# Altium PCB lab7.PcbDoc
Units mil, origin at the board's own origin, x right, y up, seen from the top; angles counter-clockwise.
Board outline 5551.18 x 3661.42 mil, 2 copper layers (Top Layer, Top, Bottom Layer, Bottom); 13 components, 0 nets, 40 pads, 0 vias.
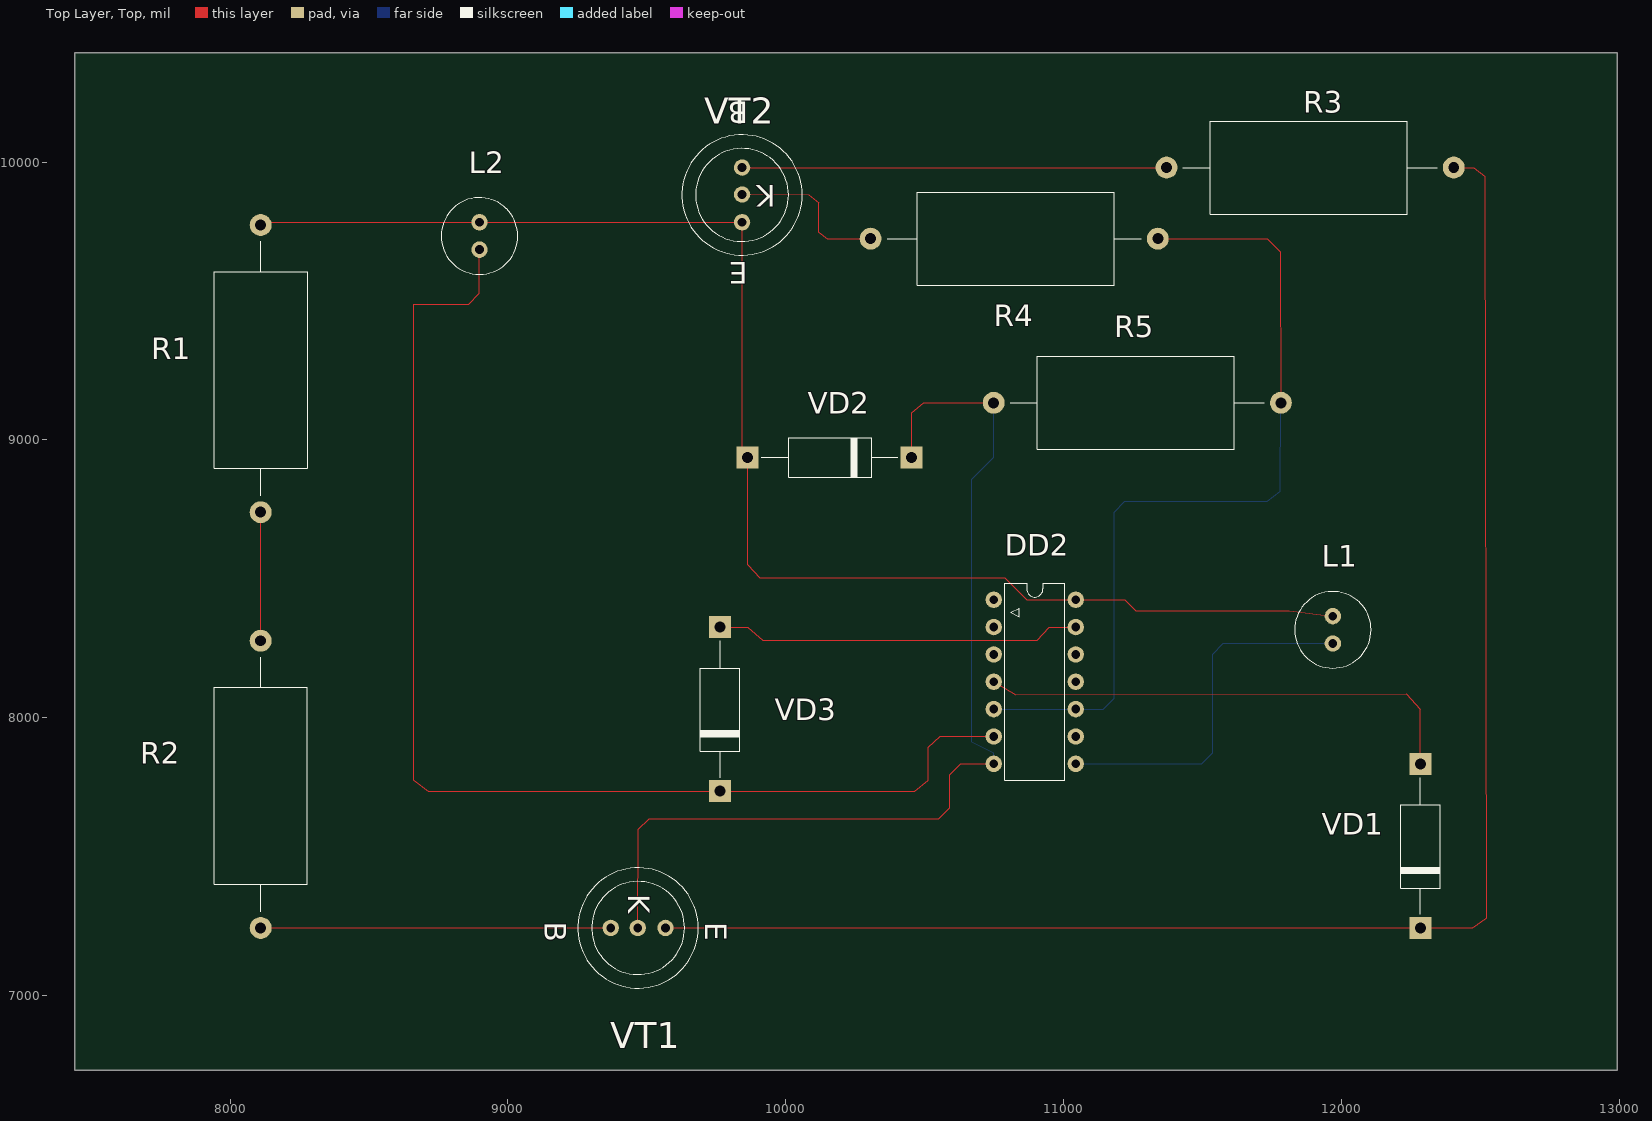
[diagram p0: Top Layer, Top view]
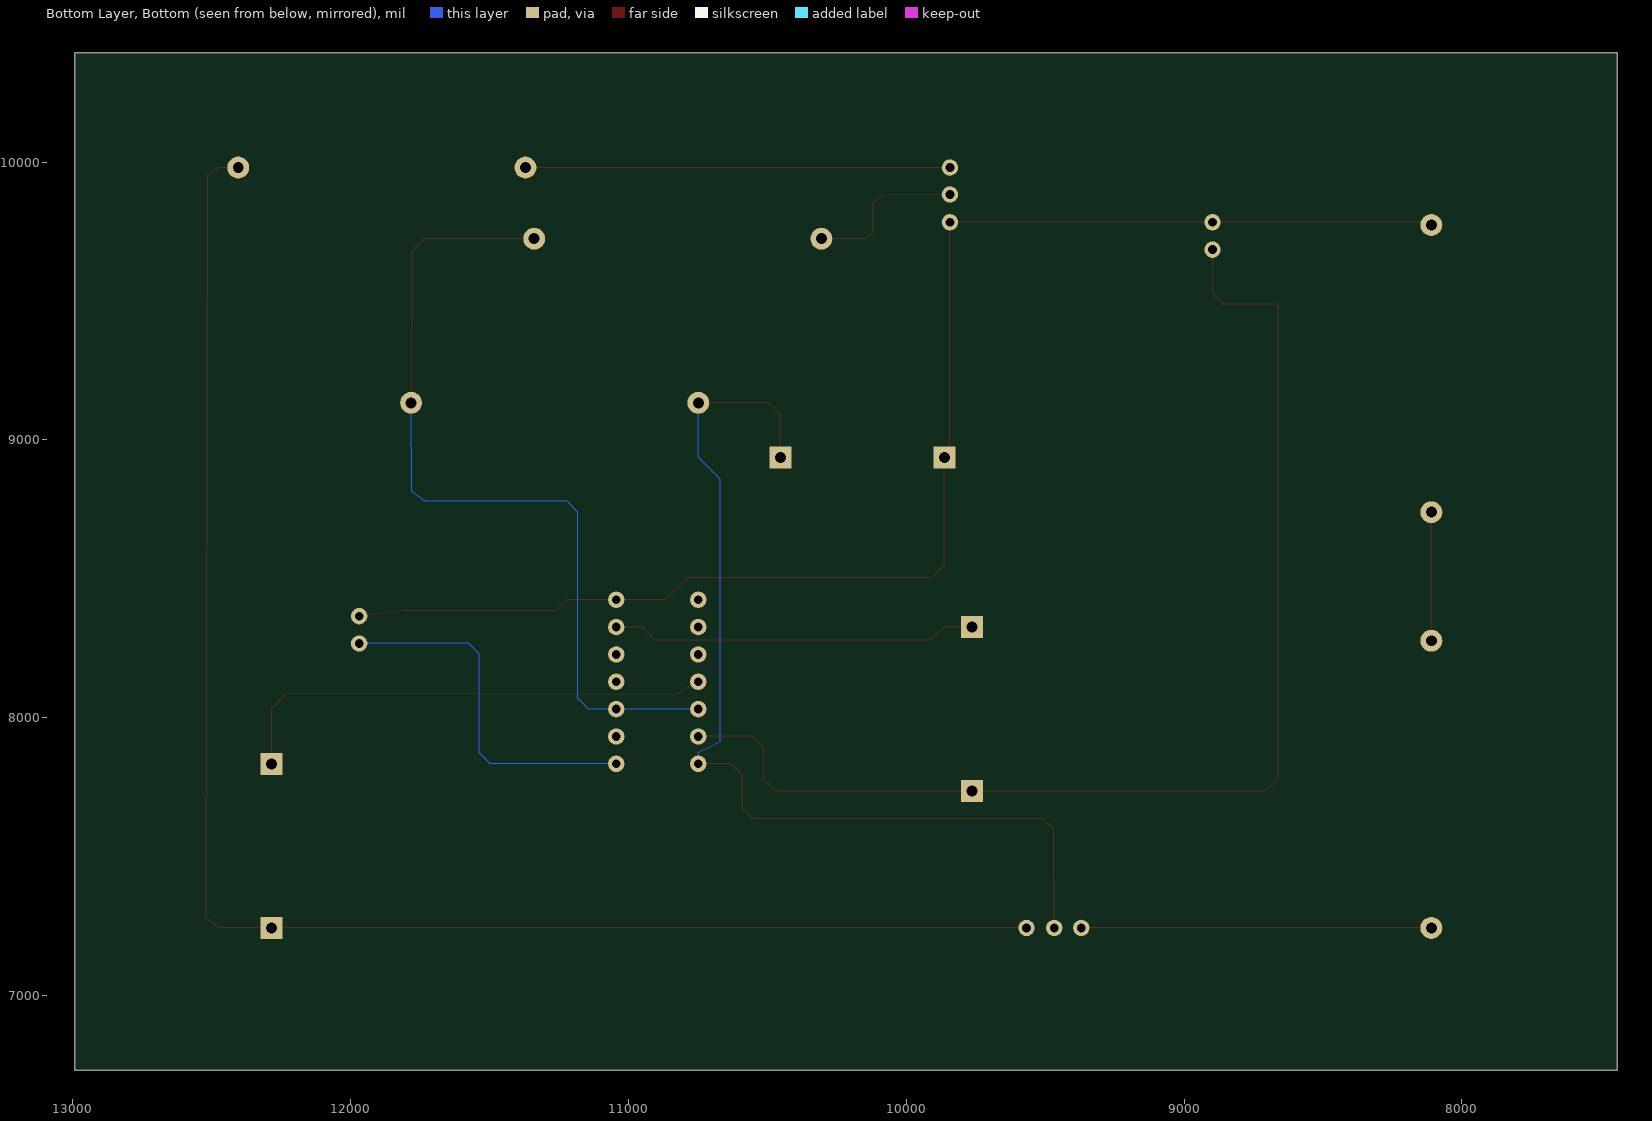
[diagram p1: Bottom Layer, Bottom view, seen from below]

## Layer stack, top to bottom
Top Solder, Top Mask: solder mask 0.4, Solder Resist, Dk 3.5
Top Layer, Top: signal copper 1.4
Dielectric 1: dielectric 12.6, FR-4, Dk 4.8
Bottom Layer, Bottom: signal copper 1.4
Bottom Solder, Bot Mask: solder mask 0.4, Solder Resist, Dk 3.5

## Board outline
7440.94,6732.28 12992.13,6732.28 12992.13,10393.7 7440.94,10393.7

## Design rules (kind name [scope] priority, off if disabled: settings)
Clearance [All] p1: gap=10 ignorepadtopadclearanceinfootprint=FALSE except(0: Arc-Hole Track-Hole SMDPad-Hole THPad-Hole Via-Hole Fill-Hole Poly-Hole Region-Hole Text-Hole; 12: Arc-Arc Arc-Track Arc-THPad Arc-Via Track-Track Track-THPad Track-Via THPad-THPad THPad-Via Via-Via)
PlaneClearance [All] p1: clearance=10
PolygonConnect [All] p1: connectstyle=Relief reliefconductorwidth=10 reliefentries=4 polygonreliefangle="90 Angle" airgapwidth=10
RoutingVias [All] p1: holewidth=28 width=50 viastyle="Through Hole" minholewidth=28 minwidth=50 maxholewidth=28 maxwidth=50
SolderMaskExpansion [All] p1: expansion=4 istentingtop=FALSE
Width [All] p1: maxlimit=10 minlimit=10 preferedwidth=10
29 further rules are at their usual default settings.

## Components (designator, comment, footprint, x,y, rotation, side; value= is the part's Value field where it differs from the comment)
DD2 "" 201.14-1 10748.03,8425.2 r0 top
L1 "{Value}" HL_MINI 11968.5,8267.72 r0 top
L2 "{Value}" HL_MINI 8897.64,9685.04 r0 top
R1 "51K" C2-33H-2W 8110.24,8740.16 r90 top
R2 "1K" C2-33H-2W 8110.24,7244.09 r90 top
R3 "3K" C2-33H-2W 11370.08,9980.32 r0 top
R4 "200" C2-33H-2W 11338.58,9724.41 r180 top
R5 "200" C2-33H-2W 10748.03,9133.86 r0 top
VD1 "" DO-7_1N34(Primary) 12283.46,7539.37 r90 top
VD2 "" DO-7_1N34(Primary) 10157.48,8937.01 r180 top
VD3 "" DO-7_1N34(Primary) 9763.78,8031.5 r90 top
VT1 "" ÃÒ320Á 9566.93,7244.09 r270 top
VT2 "" ÃÒ320Á 9842.52,9783.46 r180 top

## Footprints (in the part's own frame and the unit in brackets; to place one, negate y for a bottom-side part, rotate by r counter-clockwise, add the part's x,y. Pads: shape width x height; smd on the part's side, far side on the other; paste and mask are expansions set on the pad)
201.14-1 [mm]
  round 1.5 hole 0.8: 1(0,0) 2(0,-2.5) 3(0,-5) 4(0,-7.5) 5(0,-10) 6(0,-12.5) 7(0,-15) 8(7.5,-15) 9(7.5,-12.5) 10(7.5,-10) 11(7.5,-7.5) 12(7.5,-5) 13(7.5,-2.5) 14(7.5,0)
  silkscreen extent 1,-16.52 6.5,1.5
C2-33H-2W [mm]
  round 2 hole 1: 1(0,0) 2(26.25,0)
  silkscreen extent 1.5,-4.25 24.75,4.25
DO-7_1N34(Primary) [mm]
  rect 2x2 hole 1: A(7.5,0) K(-7.5,0)
  silkscreen extent -6.25,-1.8 6.25,1.8
HL_MINI [mm]
  round 1.5 hole 0.8: 1(0,0) 2(0,2.5)
  silkscreen extent -3.5,-2.25 3.5,4.75
ÃÒ320Á [mm]
  round 1.5 hole 0.8: 1(0,0) 2(0,-2.54) 3(0,-5)
  silkscreen extent -5.5,-8 5.5,3

## Nets (pads, with @x,y where several pads share a name; then routed paths per layer and width w, separated by ;. In a path a pad name is that pad's centre, name@x,y a point inside that pad or via, vN(x,y) a via of type N, cw(c..) or ccw(c..) an arc to the next point about the centre after c; other vN are vias at no path point)
pads on no net: DD2.1 DD2.2 DD2.3 DD2.4 DD2.5 DD2.6 DD2.7 DD2.8 DD2.9 DD2.10 DD2.11 DD2.12 DD2.13 DD2.14 L1.1 L1.2 L2.1 L2.2 R1.1 R1.2 R2.1 R2.2 R3.1 R3.2 R4.1 R4.2 R5.1 R5.2 VD1.A VD1.K VD2.A VD2.K VD3.A VD3.K VT1.1 VT1.2 VT1.3 VT2.1 VT2.2 VT2.3
copper on no net: | length 30245.9
  Top Layer, Top w3.94: 8110.24,7244.09 9370.08,7244.09 ; 8110.24,8277.56 8110.24,8740.16 ; 8110.24,9773.62 8125.98,9783.46 8897.64,9783.46 9842.52,9783.46 9842.52,8937.01 9862.2,8937.01 9862.2,8551.18 9905.51,8503.94 10787.4,8503.94 10866.14,8425.2 11043.31,8425.2 11220.47,8425.2 11259.84,8385.83 11811.02,8385.83 11968.5,8366.14 ; 8897.64,9685.04 8897.64,9527.56 8858.27,9488.19 8661.42,9488.19 8661.42,7775.59 8712.6,7736.22 9763.78,7736.22 10464.57,7736.22 10511.81,7775.59 10511.81,7893.7 10555.12,7933.07 10748.03,7933.07 ; 9466.93,7244.09 9468.5,7598.43 9507.87,7637.8 10551.18,7637.8 10590.55,7677.17 10590.55,7795.28 10629.92,7834.65 10748.03,7834.65 ; 9566.93,7244.09 12283.46,7244.09 12472.44,7244.09 12519.68,7279.53 12515.75,9948.82 12476.38,9980.32 12403.54,9980.32 ; 9763.78,8326.77 9862.2,8326.77 9917.32,8279.53 10905.51,8279.53 10948.82,8326.77 11043.31,8326.77 ; 9842.52,9883.46 10082.68,9881.89 10118.11,9854.33 10118.11,9748.03 10149.61,9724.41 10305.12,9724.41 ; 9842.52,9980.32 11370.08,9980.32 ; 10452.76,8937.01 10452.76,9098.43 10496.06,9133.86 10748.03,9133.86 ; 10748.03,8129.92 10826.77,8082.68 12232.28,8086.61 12283.46,8031.5 12283.46,7834.65 ; 11338.58,9724.41 11732.28,9724.41 11779.53,9677.17 11781.5,9133.86
  Bottom Layer, Bottom w3.94: 10748.03,7834.65 10748.03,7874.02 10669.29,7913.39 10669.29,8858.27 10748.03,8937.01 10748.03,9133.86 ; 10748.03,8031.5 11043.31,8031.5 11141.73,8031.5 11181.1,8070.87 11181.1,8740.16 11220.47,8779.53 11732.28,8779.53 11779.53,8814.96 11781.5,9133.86 ; 11043.31,7834.65 11496.06,7834.65 11535.43,7874.02 11535.43,8228.35 11574.8,8267.72 11968.5,8267.72

## Text inside footprints (layer, text, board x,y; h text height)
VT1: Top Overlay, Top Silk "E" at 9710.14,7264.46 h78.12 r270; Top Overlay, Top Silk "B" at 9132.97,7266.06 h78.12 r270; Top Overlay, Top Silk "K" at 9432.97,7366.06 h78.12 r270; Mechanical 1, Top Assy "E" at 9710.14,7264.46 h78.12 r270; Mechanical 1, Top Assy "B" at 9132.97,7266.06 h78.12 r270; Mechanical 1, Top Assy "K" at 9432.97,7366.06 h78.12 r270
VT2: Top Overlay, Top Silk "E" at 9862.88,9640.26 h78.12 r180; Top Overlay, Top Silk "B" at 9864.48,10217.42 h78.12 r180; Top Overlay, Top Silk "K" at 9964.48,9917.42 h78.12 r180; Mechanical 1, Top Assy "E" at 9862.88,9640.26 h78.12 r180; Mechanical 1, Top Assy "B" at 9864.48,10217.42 h78.12 r180; Mechanical 1, Top Assy "K" at 9964.48,9917.42 h78.12 r180